# Altium PCB 万能贴片转直插板.PcbDoc
Units mm, origin at the board's own origin, x right, y up, seen from the top; angles counter-clockwise.
Board outline 152.4 x 101.6 mm, 2 copper layers (Top Layer, Bottom Layer); 5 components, 64 nets, 132 pads, 0 vias.
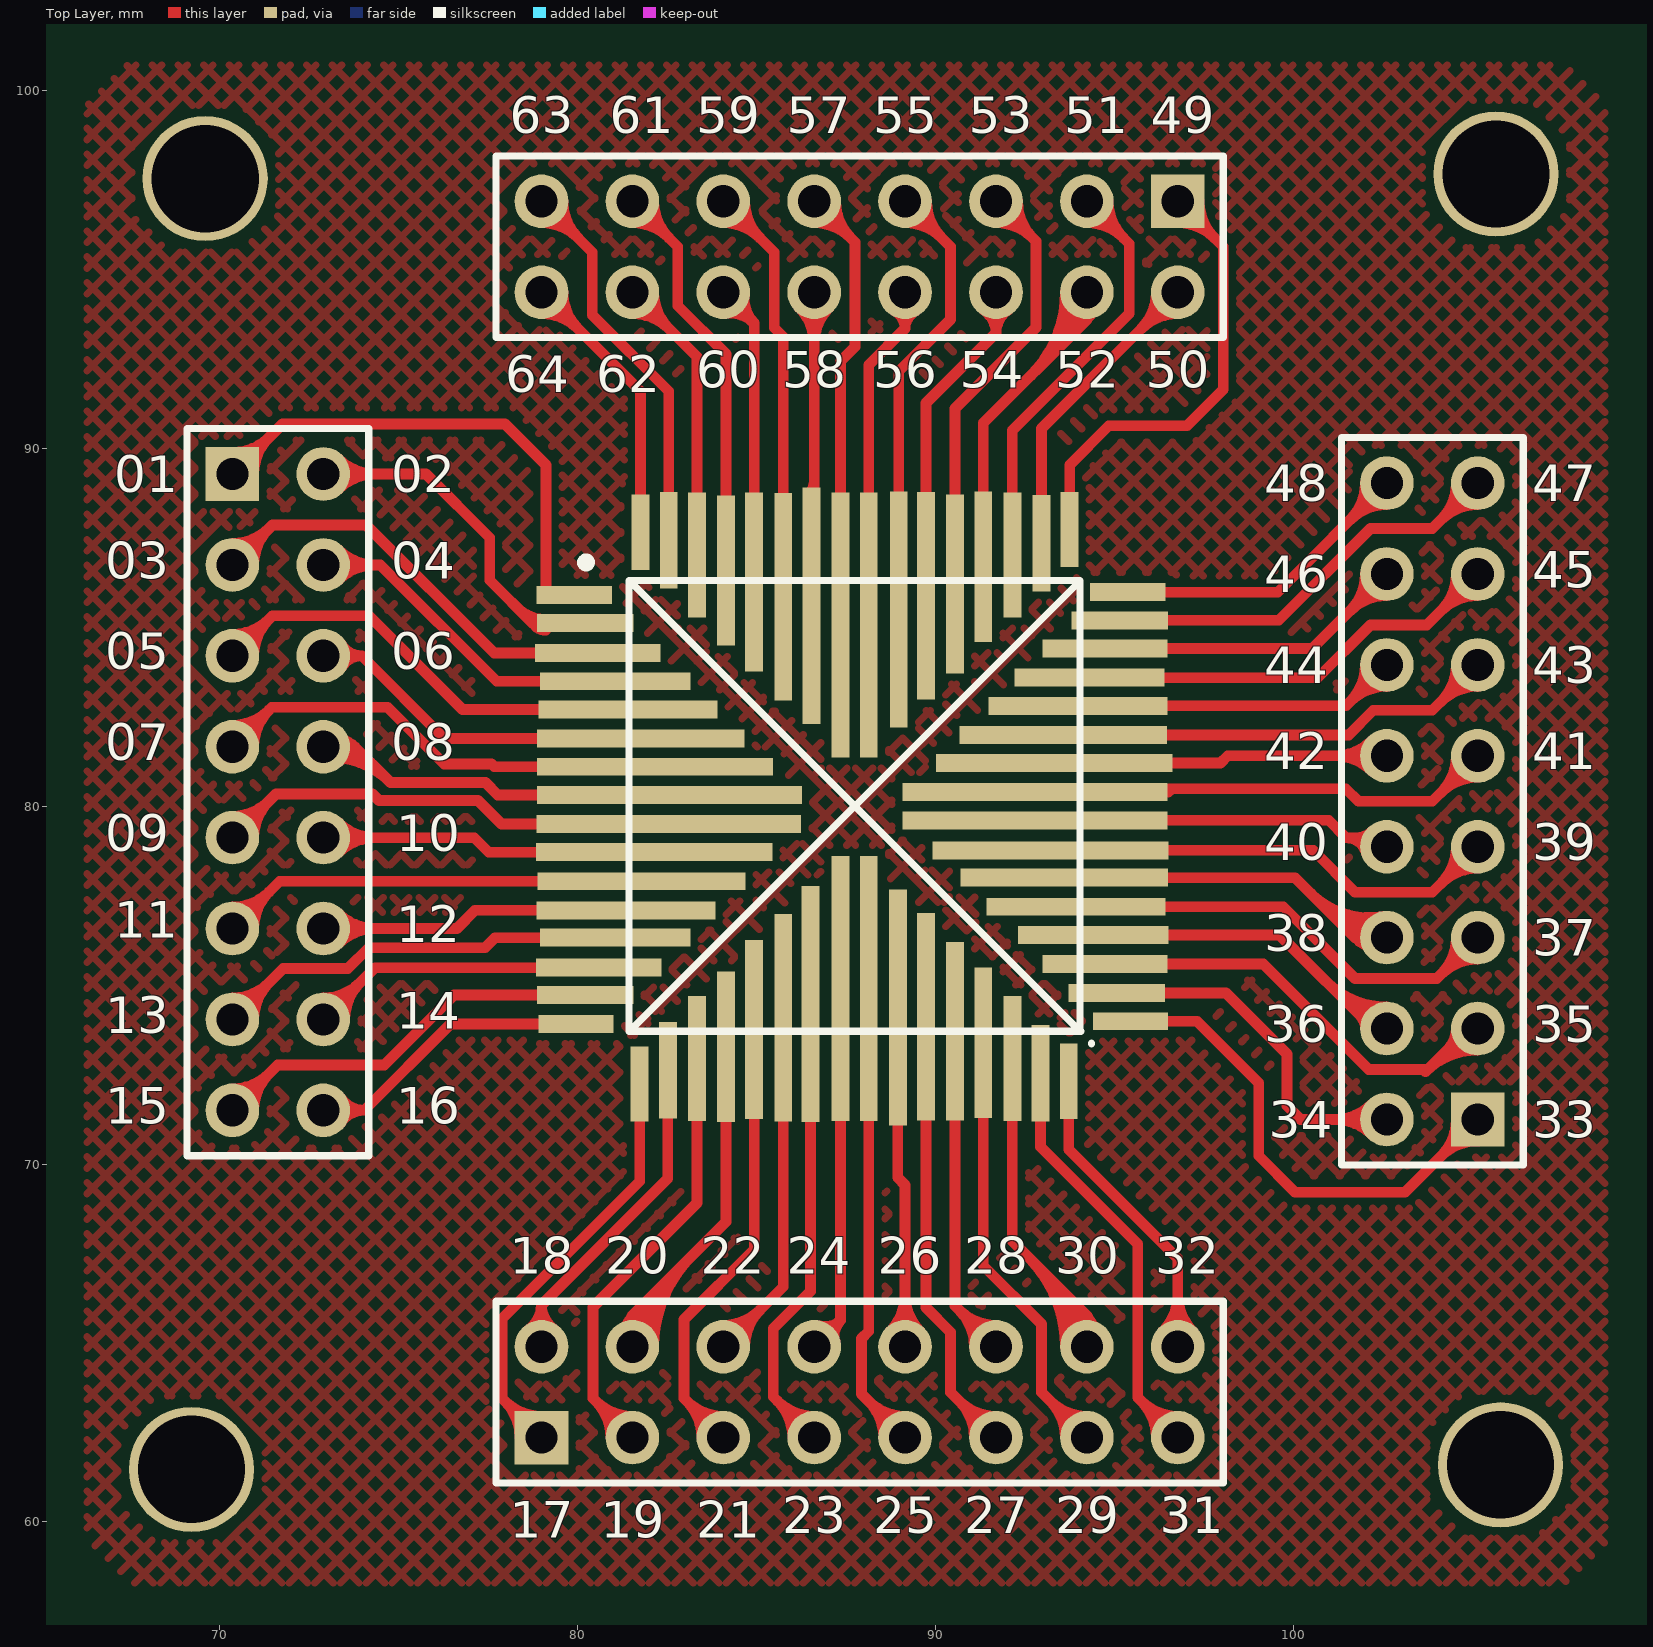
[diagram p0: Top Layer view]
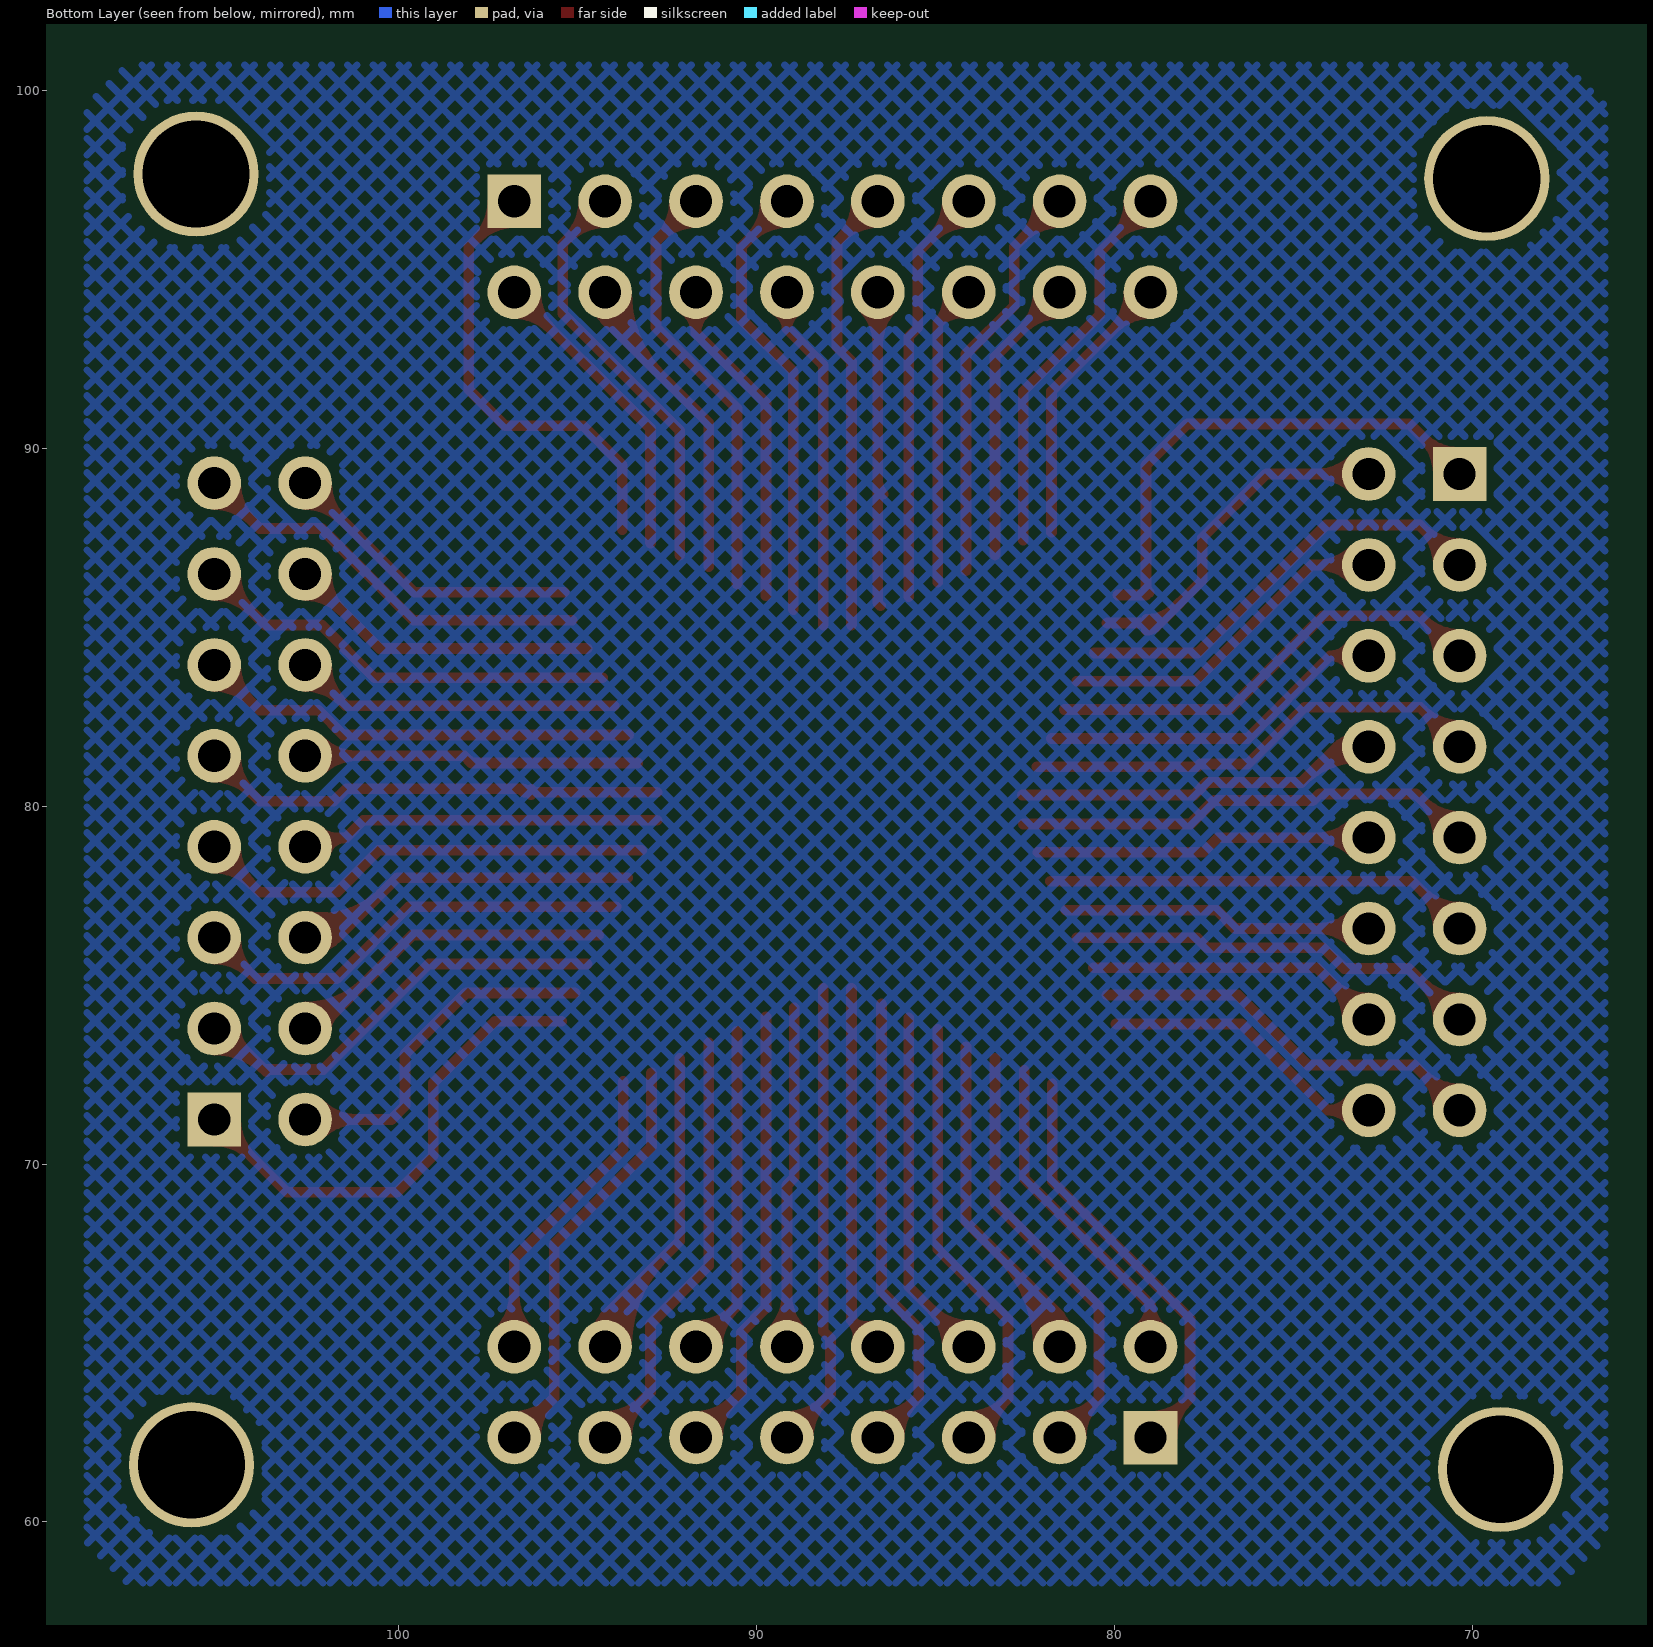
[diagram p1: Bottom Layer view, seen from below]

## Layer stack, top to bottom
Top Layer: signal copper 0.0356
Dielectric: dielectric 0.32, FR-4, Dk 4.8
Bottom Layer: signal copper 0.0356

## Board outline
25.4,25.4 177.8,25.4 177.8,127 25.4,127

## Design rules (kind name [scope] priority, off if disabled: settings)
Clearance [All] p1: gap=0.2
ComponentClearance [All] p1: gap=0.254 collisioncheckmode=3 verticalgap=0.254
PolygonConnect [All] p1: connectstyle=Relief reliefconductorwidth=0.254 reliefentries=4 polygonreliefangle="90 Angle"
RoutingVias [All] p1: holewidth=0.711 width=1.27 viastyle="Through Hole" minholewidth=0.711 minwidth=1.27 maxholewidth=0.711 maxwidth=1.27
SolderMaskExpansion [All] p1: expansion=0.102
TestPointUsage [All] p1: valid=0 allowmultiple=FALSE
Testpoint [All] p1: side=7 testpointundercomponent=TRUE minsize=1.016 maxsize=2.54 preferedsize=1.524 minholesize=0 maxholesize=1.016 preferedholesize=0.813 testpointgrid=0.025 style=1021 order=0123456789
Width [All] p1: maxlimit=0.3 minlimit=0.3 preferedwidth=0.3
17 further rules are at their usual default settings.

## Components (designator, comment, footprint, x,y, rotation, side; value= is the part's Value field where it differs from the comment)
P1 "Header 8X2" HDR2X8 70.358,89.281 r270 top
P2 "Header 8X2" HDR2X8 78.994,62.357 r0 top
P3 "Header 8X2" HDR2X8 105.156,71.247 r90 top
P4 "Header 8X2" HDR2X8 96.774,96.901 r180 top
U1 "ATmega128-16AI" wanneng_2 79.248,85.979 r0 top

## Footprints (in the part's own frame and the unit in brackets; to place one, negate y for a bottom-side part, rotate by r counter-clockwise, add the part's x,y. Pads: shape width x height; smd on the part's side, far side on the other; paste and mask are expansions set on the pad)
HDR2X8 [mm] "Connector; Header; 8x2 Position"
  rect 1.5x1.5 hole 0.9: 1(0,0)
  round 1.5 hole 0.9: 2(0,2.54) 3(2.54,0) 4(2.54,2.54) 5(5.08,0) 6(5.08,2.54) 7(7.62,0) 8(7.62,2.54) 9(10.16,0) 10(10.16,2.54) 11(12.7,0) 12(12.7,2.54) 13(15.24,0) 14(15.24,2.54) 15(17.78,0) 16(17.78,2.54)
  silkscreen extent -1.27,-1.27 19.05,3.81
wanneng_2 [mm]
  rect 2.1x0.5 smd paste+0: 1(0.66,-0.076) 33(16.205,-11.989)
  rect 2.7x0.5 smd: 2(0.965,-0.864) 15(0.965,-11.252) 34(15.824,-11.201) 47(15.9,-0.787)
  rect 3.5x0.5 smd: 3(1.321,-1.702) 14(1.346,-10.49) 35(15.494,-10.389) 46(15.494,-1.575)
  rect 4.2x0.5 smd: 4(1.809,-2.489) 13(1.809,-9.652) 36(15.165,-9.576) 45(15.057,-2.388)
  rect 5x0.5 smd: 5(2.159,-3.277) 12(2.108,-8.89) 37(14.681,-8.788) 44(14.732,-3.175)
  rect 5.8x0.5 smd: 6(2.515,-4.089) 11(2.54,-8.077) 38(14.351,-7.976) 43(14.326,-3.988)
  rect 6.6x0.5 smd: 7(2.921,-4.877) 10(2.896,-7.264) 39(13.97,-7.214) 42(14.072,-4.775)
  rect 7.4x0.5 smd: 8(3.327,-5.664) 9(3.302,-6.477) 40(13.538,-6.375) 41(13.538,-5.588)
  rect 2.1x0.5 smd: 16(0.711,-12.065) 48(16.129,0)
  rect 0.5x2.1 smd paste+0: 17(2.489,-13.741) 49(14.503,1.753)
  rect 0.5x2.7 smd: 18(3.277,-13.36) 31(13.691,-13.437) 50(13.716,1.372) 63(3.302,1.448)
  rect 0.5x3.5 smd: 19(4.089,-13.03) 30(12.903,-13.03) 51(12.903,1.041) 62(4.089,1.041)
  rect 0.5x4.2 smd: 20(4.902,-12.701) 29(12.09,-12.593) 52(12.09,0.712) 61(4.902,0.604)
  rect 0.5x5 smd: 21(5.69,-12.217) 28(11.303,-12.268) 53(11.303,0.229) 60(5.69,0.279)
  rect 0.5x5.8 smd: 22(6.502,-11.887) 27(10.49,-11.862) 54(10.49,-0.102) 59(6.502,-0.127)
  rect 0.5x6.6 smd: 23(7.264,-11.506) 26(9.703,-11.608) 55(9.728,-0.483) 58(7.29,-0.381)
  rect 0.5x7.4 smd: 24(8.103,-11.074) 25(8.89,-11.074) 56(8.89,-0.914) 57(8.103,-0.914)
  rect 0.5x2.1 smd: 32(14.478,-13.665) 64(2.515,1.676)
  silkscreen extent 0.87,-12.62 15.11,0.96

## Part data
P1 P2 P3 P4: "Header, 8-Pin, Dual row"
U1: "8-Bit AVR Microcontroller with 128K Bytes of In-System Programmable Flash Memory"

## Free pads (board coordinates)
  round 3.5 hole 3: 0(69.596,97.536) 1(105.664,97.663) 2(105.791,61.595) 3(69.215,61.468)

## Nets (pads, with @x,y where several pads share a name; then routed paths per layer and width w, separated by ;. In a path a pad name is that pad's centre, name@x,y a point inside that pad or via, vN(x,y) a via of type N, cw(c..) or ccw(c..) an arc to the next point about the centre after c; other vN are vias at no path point)
01: P1.1 U1.1 | length 16.7
  Top Layer w0.3: P1.1 71.755,90.678 77.978,90.678 79.121,89.535 79.121,85.903 U1.1 ; P1.1@70.358,89.881 ccw(c70.358,91.33) 71.382,90.305 ccw(c72.407,89.281) P1.1@70.958,89.281 ; U1.1@79.038,85.974 ccw(c78.837,86.175) 79.121,86.175
02: P1.2 U1.2 | length 13.2
  Top Layer w0.3: P1.2 75.768,89.281 77.546,87.503 77.546,86.309 78.74,85.115 U1.2 ; P1.2@73.322,88.857 cw(c74.347,87.832) 74.347,89.281 cw(c74.347,90.73) P1.2@73.322,89.705 ; 78.305,85.55 ccw(c79.113,86.358) U1.2@79.113,85.215 ; 78.818,85.038 ccw(c79.113,85.334) U1.2@79.113,84.915
03: P1.3 U1.3 | length 14.4
  Top Layer w0.3: P1.3 71.476,87.859 74.092,87.859 77.673,84.277 U1.3 ; P1.3@70.358,87.341 ccw(c70.358,88.79) 71.382,87.765 ccw(c72.407,86.741) P1.3@70.958,86.741
04: P1.4 U1.4 | length 11.8
  Top Layer w0.3: P1.4 74.49,86.741 77.742,83.49 U1.4 ; P1.4@73.322,86.317 cw(c74.347,85.292) 74.347,86.741 cw(c74.347,88.19) P1.4@73.322,87.165
05: P1.5 U1.5 | length 14.9
  Top Layer w0.3: P1.5 71.476,85.319 74.172,85.319 76.788,82.702 U1.5 ; P1.5@70.358,84.801 ccw(c70.358,86.25) 71.382,85.225 ccw(c72.407,84.201) P1.5@70.958,84.201
06: P1.6 U1.6 | length 11.2
  Top Layer w0.3: P1.6 73.97,84.201 ; P1.6@73.41,83.887 cw(c73.97,83.544) 73.97,84.201 ; P1.6@73.41,84.515 ccw(c73.97,84.858) 73.97,84.201 ; U1.6 76.281,81.89 73.97,84.201
07: P1.7 U1.7 | length 15.2
  Top Layer w0.3: P1.7 71.458,82.761 74.694,82.761 76.276,81.178 77.597,81.178 77.673,81.102 U1.7 ; P1.7@70.358,82.261 ccw(c70.358,83.71) 71.382,82.685 ccw(c72.407,81.661) P1.7@70.958,81.661
08: P1.8 U1.8 | length 18.6
  Top Layer w0.3: P1.8@72.875,81.96 cw(c72.968,80.745) 73.83,81.607 ; P1.8@72.921,81.362 cw(c73.099,79.03) 74.753,80.684 ; P1.8@73.107,81.445 cw(c73.549,80.988) 73.998,81.438 ; P1.8@73.315,81.23 cw(c73.761,80.769) 74.214,81.222 ; P1.8@73.457,81.443 cw(c73.775,81.319) 73.775,81.661 ; P1.8@73.457,81.879 ccw(c73.775,82.003) 73.775,81.661 ; 73.783,81.654 ccw(c73.337,81.208) P1.8 ; 74.291,81.145 ccw(c73.034,79.888) P1.8 ; U1.8 77.775,80.315 77.429,80.661 74.775,80.661 73.775,81.661 ; P1.8 73.775,81.661
09: P1.9 U1.9 | length 15.3
  Top Layer w0.3: P1.9 71.577,80.34 74.275,80.34 74.455,80.161 77.217,80.161 77.876,79.502 U1.9 ; P1.9@70.358,79.721 ccw(c70.358,81.17) 71.382,80.145 ccw(c72.407,79.121) P1.9@70.958,79.121
10: P1.10 U1.10 | length 11.7
  Top Layer w0.3: P1.10 77.114,79.121 77.521,78.715 U1.10 ; P1.10@73.322,78.697 cw(c74.347,77.672) 74.347,79.121 cw(c74.347,80.57) P1.10@73.322,79.545
11: P1.11 U1.11 | length 14.3
  Top Layer w0.3: P1.11 71.679,77.902 U1.11 ; P1.11@70.358,77.181 ccw(c70.358,78.63) 71.382,77.605 ccw(c72.407,76.581) P1.11@70.958,76.581
12: P1.12 U1.12 | length 10.9
  Top Layer w0.3: P1.12 76.632,76.581 77.14,77.089 U1.12 ; P1.12@73.322,76.157 cw(c74.347,75.132) 74.347,76.581 cw(c74.347,78.03) P1.12@73.322,77.005
13: P1.13 U1.13 | length 13.9
  Top Layer w0.3: P1.13 71.78,75.463 73.584,75.463 74.168,76.048 77.419,76.048 77.699,76.327 U1.13 ; P1.13@70.358,74.641 ccw(c70.358,76.09) 71.382,75.065 ccw(c72.407,74.041) P1.13@70.958,74.041
14: P1.14 U1.14 | length 10.6
  Top Layer w0.3: P1.14 74.346,75.489 U1.14 ; P1.14@72.898,74.641 ccw(c72.898,76.09) 73.922,75.065 ccw(c74.947,74.041) P1.14@73.498,74.041
15: P1.15 U1.15 | length 13.5
  Top Layer w0.3: P1.15 71.628,72.771 74.6,72.771 76.556,74.727 U1.15 ; P1.15@70.358,72.101 ccw(c70.358,73.55) 71.382,72.525 ccw(c72.407,71.501) P1.15@70.958,71.501
16: P1.16 U1.16 | length 9.6
  Top Layer w0.3: P1.16 74.041,71.501 ; P1.16@73.392,71.16 cw(c74.041,70.712) 74.041,71.501 ; P1.16@73.392,71.842 ccw(c74.041,72.29) 74.041,71.501 ; U1.16 76.454,73.914 74.041,71.501
17: P2.1 U1.17 | length 14.2
  Top Layer w0.3: P2.1@78.394,62.357 ccw(c76.945,62.357) 77.97,63.381 ccw(c78.994,64.406) P2.1@78.994,62.957 ; P2.1 77.894,63.457 77.894,65.677 81.737,69.52 U1.17
18: P2.2 U1.18 | length 10.8
  Top Layer w0.3: P2.2@78.644,65.385 ccw(c78.156,66.065) 78.994,66.065 ; P2.2 78.994,66.065 ; P2.2@79.344,65.385 cw(c79.832,66.065) 78.994,66.065 ; U1.18 82.525,69.596 78.994,66.065
19: P2.3 U1.19 | length 14.5
  Top Layer w0.3: P2.3@80.934,62.357 ccw(c79.485,62.357) 80.51,63.381 ccw(c81.534,64.406) P2.3@81.534,62.957 ; P2.3 80.434,63.457 80.434,66.007 83.337,68.91 U1.19
20: P2.4 U1.20 | length 18.1
  Top Layer w0.3: P2.4@81.234,64.897 cw(c82.627,64.897) 81.642,65.882 ; P2.4@81.317,65.456 ccw(c81.193,65.774) 81.534,65.774 ; P2.4@81.751,65.456 cw(c81.875,65.774) 81.534,65.774 ; P2.4@81.834,64.897 cw(c84.675,64.897) 82.666,66.906 ; P2.4@82.134,64.897 cw(c85.7,64.897) 83.178,67.418 ; 82.154,66.394 ccw(c83.651,64.897) P2.4 81.534,65.774 ; U1.20 84.15,68.39 81.534,65.774
21: P2.5 U1.21 | length 14.9
  Top Layer w0.3: P2.5@83.474,62.357 ccw(c82.025,62.357) 83.05,63.381 ccw(c84.074,64.406) P2.5@84.074,62.957 ; P2.5 82.974,63.457 82.974,65.659 84.938,67.623 U1.21
22: P2.6 U1.22 | length 12.2
  Top Layer w0.3: P2.6 85.75,66.573 U1.22 ; P2.6@84.074,65.497 ccw(c84.074,66.946) 85.098,65.921 ccw(c86.123,64.897) P2.6@84.674,64.897
23: P2.7 U1.23 | length 15.3
  Top Layer w0.3: P2.7@86.014,62.357 ccw(c84.565,62.357) 85.59,63.381 ccw(c86.614,64.406) P2.7@86.614,62.957 ; U1.23 86.512,66.446 85.471,65.405 85.471,63.5 P2.7
24: P2.8 U1.24 | length 11.6
  Top Layer w0.3: P2.8 87.351,65.634 ; P2.8@86.768,65.477 ccw(c86.923,66.061) 87.351,65.634 ; P2.8@87.194,65.051 cw(c87.778,65.206) 87.351,65.634 ; U1.24 87.351,65.634
25: P2.9 U1.25 | length 15.4
  Top Layer w0.3: U1.25 88.138,65.329 87.935,65.126 87.935,63.576 P2.9 ; P2.9@88.554,62.357 ccw(c87.105,62.357) 88.13,63.381 ccw(c89.154,64.406) P2.9@89.154,62.957
26: P2.10 U1.26 | length 11.8
  Top Layer w0.3: P2.10@88.73,65.321 ccw(c87.705,66.346) 89.154,66.346 ccw(c90.603,66.346) P2.10@89.578,65.321 ; U1.26 88.951,69.621 89.154,69.418 P2.10
27: P2.11 U1.27 | length 14.8
  Top Layer w0.3: U1.27 89.738,65.989 90.424,65.303 90.424,63.627 P2.11 ; P2.11@91.094,62.357 ccw(c89.645,62.357) 90.67,63.381 ccw(c91.694,64.406) P2.11@91.694,62.957
28: P2.12 U1.28 | length 11.6
  Top Layer w0.3: U1.28 90.551,66.04 P2.12 ; P2.12@91.094,64.897 ccw(c89.645,64.897) 90.67,65.921 ccw(c91.694,66.946) P2.12@91.694,65.497
29: P2.13 U1.29 | length 14.5
  Top Layer w0.3: U1.29 91.338,67.158 92.964,65.532 92.964,63.627 P2.13 ; P2.13@93.634,62.357 ccw(c92.185,62.357) 93.21,63.381 ccw(c94.234,64.406) P2.13@94.234,62.957
30: P2.14 U1.30 | length 17.4
  Top Layer w0.3: U1.30 92.151,67.847 94.234,65.765 ; 92.596,67.402 cw(c90.091,64.897) P2.14@93.634,64.897 ; 93.108,66.89 cw(c91.115,64.897) P2.14@93.934,64.897 ; 93.621,66.378 cw(c92.14,64.897) P2.14 94.234,65.765 ; P2.14@94.022,65.458 ccw(c93.907,65.764) 94.234,65.764 ; 94.133,65.866 cw(c93.164,64.897) P2.14@94.534,64.897 ; P2.14@94.446,65.458 cw(c94.561,65.764) 94.234,65.764
31: P2.15 U1.31 | length 14
  Top Layer w0.3: U1.31 92.939,70.485 95.656,67.767 95.656,63.475 P2.15 ; P2.15@96.174,62.357 ccw(c94.725,62.357) 95.75,63.381 ccw(c96.774,64.406) P2.15@96.774,62.957
32: P2.16 U1.32 | length 11
  Top Layer w0.3: U1.32 93.726,70.409 96.774,67.361 P2.16 ; P2.16@96.35,65.321 ccw(c95.325,66.346) 96.774,66.346 ccw(c98.223,66.346) P2.16@97.198,65.321
33: P3.1 U1.33 | length 16
  Top Layer w0.3: U1.33 97.307,73.99 99.035,72.263 99.035,70.231 100.051,69.215 103.124,69.215 P3.1 ; P3.1@104.556,71.247 cw(c103.107,71.247) 104.132,70.223 cw(c105.156,69.198) P3.1@105.156,70.647
34: P3.2 U1.34 | length 12.1
  Top Layer w0.3: U1.34 98.12,74.778 99.822,73.076 99.822,71.628 100.203,71.247 P3.2 ; P3.2@102.192,70.823 ccw(c101.167,69.798) 101.167,71.247 ccw(c101.167,72.696) P3.2@102.192,71.671
35: P3.3 U1.35 | length 15.4
  Top Layer w0.3: U1.35 99.162,75.59 102.108,72.644 103.759,72.644 104.902,73.787 P3.3 ; 103.698,72.583 cw(c105.156,71.125) P3.3@105.156,73.187 ; 104.21,73.095 cw(c105.156,72.15) P3.3@105.156,73.487 ; 104.311,73.196 ccw(c103.721,73.787) P3.3@104.556,73.787
36: P3.4 U1.36 | length 12.9
  Top Layer w0.3: U1.36 99.619,76.403 102.235,73.787 P3.4 ; 100.941,75.081 ccw(c102.616,76.755) P3.4@102.616,74.387 ; 101.453,74.569 ccw(c102.616,75.731) P3.4@102.616,74.087 ; 101.861,74.161 cw(c101.487,73.787) P3.4@102.016,73.787
37: P3.5 U1.37 | length 14.8
  Top Layer w0.3: U1.37 99.72,77.191 101.727,75.184 104.013,75.184 P3.5 ; P3.5@104.556,76.327 cw(c103.107,76.327) 104.132,75.303 cw(c105.156,74.278) P3.5@105.156,75.727
38: P3.6 U1.38 | length 17
  Top Layer w0.3: U1.38 100.051,78.003 101.727,76.327 ; 100.495,77.559 ccw(c102.123,79.186) P3.6@102.514,76.918 ; 100.904,77.15 ccw(c102.243,78.488) P3.6@102.565,76.623 ; 101.314,76.74 ccw(c102.364,77.79) P3.6 101.727,76.327 ; 101.723,76.331 ccw(c102.484,77.092) P3.6@102.667,76.031 ; P3.6@102.06,76.103 ccw(c101.727,75.968) 101.727,76.327 ; P3.6@102.06,76.551 cw(c101.727,76.686) 101.727,76.327
39: P3.7 U1.39 | length 15.2
  Top Layer w0.3: U1.39 100.559,78.765 101.727,77.597 103.886,77.597 P3.7 ; P3.7@104.556,78.867 cw(c103.107,78.867) 104.132,77.843 cw(c105.156,76.818) P3.7@105.156,78.267
40: P3.8 U1.40 | length 12
  Top Layer w0.3: U1.40 100.99,79.604 101.473,79.121 ; 101.781,79.121 ccw(c101.781,79.702) P3.8@102.192,79.291 ; 101.875,79.121 cw(c101.875,78.648) P3.8@102.328,78.782 ; P3.8@102.041,78.697 ccw(c101.473,78.529) 101.473,79.121 ; P3.8 102.362,79.121 101.473,79.121
41: P3.9 U1.41 | length 16.5
  Top Layer w0.3: U1.41 96.499,80.391 96.596,80.488 ; U1.41@96.298,80.47 ccw(c96.436,80.648) 96.596,80.488 ; U1.41@96.307,80.32 cw(c96.713,79.914) 96.713,80.488 ; U1.41@96.321,80.337 cw(c96.596,80.162) 96.596,80.488 ; P3.9@104.556,81.407 cw(c103.107,81.407) 104.132,80.383 cw(c105.156,79.358) P3.9@105.156,80.807 ; P3.9 103.886,80.137 101.82,80.137 101.469,80.488 96.596,80.488
42: P3.10 U1.42 | length 11.7
  Top Layer w0.3: U1.42 97.968,81.204 98.171,81.407 P3.10 ; P3.10@102.192,80.983 ccw(c101.167,79.958) 101.167,81.407 ccw(c101.167,82.856) P3.10@102.192,81.831
43: P3.11 U1.43 | length 14.7
  Top Layer w0.3: U1.43 101.549,81.991 102.235,82.677 103.886,82.677 P3.11 ; P3.11@104.556,83.947 cw(c103.107,83.947) 104.132,82.923 cw(c105.156,81.898) P3.11@105.156,83.347
44: P3.12 U1.44 | length 11.4
  Top Layer w0.3: U1.44 101.473,82.804 P3.12 ; P3.12@102.016,83.947 cw(c100.567,83.947) 101.592,82.923 cw(c102.616,81.898) P3.12@102.616,83.347
45: P3.13 U1.45 | length 14.3
  Top Layer w0.3: U1.45 100.686,83.591 102.159,85.065 103.734,85.065 P3.13 ; P3.13@104.556,86.487 cw(c103.107,86.487) 104.132,85.463 cw(c105.156,84.438) P3.13@105.156,85.887
46: P3.14 U1.46 | length 11
  Top Layer w0.3: U1.46 100.533,84.404 P3.14 ; P3.14@102.016,86.487 cw(c100.567,86.487) 101.592,85.463 cw(c102.616,84.438) P3.14@102.616,85.887
47: P3.15 U1.47 | length 13.9
  Top Layer w0.3: U1.47 99.593,85.192 102.159,87.757 103.886,87.757 P3.15 ; P3.15@104.556,89.027 cw(c103.107,89.027) 104.132,88.003 cw(c105.156,86.978) P3.15@105.156,88.427
48: P3.16 U1.48 | length 10.8
  Top Layer w0.3: U1.48 99.568,85.979 P3.16 ; P3.16@102.016,89.027 cw(c100.567,89.027) 101.592,88.003 cw(c102.616,86.978) P3.16@102.616,88.427
49: P4.1 U1.49 | length 15
  Top Layer w0.3: U1.49 93.751,89.535 94.844,90.627 97.028,90.627 98.044,91.643 98.044,95.631 P4.1 ; P4.1@96.774,96.301 cw(c96.774,94.852) 97.798,95.877 cw(c98.823,96.901) P4.1@97.374,96.901
50: P4.2 U1.50 | length 10.9
  Top Layer w0.3: U1.50 92.964,90.551 P4.2 ; P4.2@96.174,94.361 cw(c94.725,94.361) 95.75,93.337 cw(c96.774,92.312) P4.2@96.774,93.761
51: P4.3 U1.51 | length 14
  Top Layer w0.3: U1.51 92.151,90.5 95.42,93.769 95.42,95.715 P4.3 ; P4.3@94.234,96.301 cw(c94.234,94.852) 95.258,95.877 cw(c96.283,96.901) P4.3@94.834,96.901
52: P4.4 U1.52 | length 16.3
  Top Layer w0.3: U1.52 91.338,90.703 94.234,93.599 ; 92.671,92.036 ccw(c90.346,94.361) P4.4@93.634,94.361 ; 93.183,92.548 ccw(c91.37,94.361) P4.4@93.934,94.361 ; 93.695,93.06 ccw(c92.394,94.361) P4.4 94.234,93.599 ; P4.4@94.093,93.778 cw(c94.05,93.599) 94.234,93.599 ; 94.207,93.572 ccw(c93.419,94.361) P4.4@94.534,94.361 ; P4.4@94.375,93.778 ccw(c94.418,93.599) 94.234,93.599
53: P4.5 U1.53 | length 14.4
  Top Layer w0.3: U1.53 90.551,91.114 92.812,93.374 92.812,95.783 P4.5 ; P4.5@91.694,96.301 cw(c91.694,94.852) 92.718,95.877 cw(c93.743,96.901) P4.5@92.294,96.901
54: P4.6 U1.54 | length 10.8
  Top Layer w0.3: U1.54 89.738,91.262 91.694,93.218 ; P4.6@91.353,93.867 cw(c90.905,93.218) 91.694,93.218 ; P4.6 91.694,93.218 ; P4.6@92.035,93.867 ccw(c92.483,93.218) 91.694,93.218
55: P4.7 U1.55 | length 14.8
  Top Layer w0.3: U1.55 88.976,92.151 90.424,93.599 90.424,95.631 P4.7 ; P4.7@89.154,96.301 cw(c89.154,94.852) 90.178,95.877 cw(c91.203,96.901) P4.7@89.754,96.901
56: P4.8 U1.56 | length 10.9
  Top Layer w0.3: U1.56 88.138,92.329 89.154,93.345 ; P4.8@88.864,93.836 cw(c88.594,93.345) 89.154,93.345 ; P4.8 89.154,93.345 ; P4.8@89.444,93.836 ccw(c89.714,93.345) 89.154,93.345
57: P4.9 U1.57 | length 14.8
  Top Layer w0.3: P4.9@86.614,96.301 cw(c86.614,94.852) 87.638,95.877 cw(c88.663,96.901) P4.9@87.214,96.901 ; P4.9 87.757,95.758 87.757,92.837 87.351,92.431 U1.57
58: P4.10 U1.58 | length 11.5
  Top Layer w0.3: P4.10@86.19,93.937 cw(c85.165,92.912) 86.614,92.912 cw(c88.063,92.912) P4.10@87.038,93.937 ; U1.58@86.467,88.719 ccw(c86.112,89.073) 86.614,89.073 ; U1.58 86.614,85.674 P4.10
59: P4.11 U1.59 | length 14
  Top Layer w0.3: P4.11@84.074,96.301 cw(c84.074,94.852) 85.098,95.877 cw(c86.123,96.901) P4.11@84.674,96.901 ; P4.11 85.496,95.479 85.496,93.37 85.75,93.116 U1.59
60: P4.12 U1.60 | length 10.2
  Top Layer w0.3: P4.12 84.938,93.497 ; P4.12@84.151,93.766 cw(c84.271,92.831) 84.938,93.497 ; P4.12@84.669,94.284 ccw(c85.604,94.164) 84.938,93.497 ; U1.60 84.938,93.497
61: P4.13 U1.61 | length 13.7
  Top Layer w0.3: P4.13@81.534,96.301 cw(c81.534,94.852) 82.558,95.877 cw(c83.583,96.901) P4.13@82.134,96.901 ; P4.13 82.804,95.631 82.804,93.98 84.15,92.634 U1.61
62: P4.14 U1.62 | length 10.4
  Top Layer w0.3: P4.14@81.534,93.761 cw(c81.534,92.312) 82.558,93.337 cw(c83.583,94.361) P4.14@82.134,94.361 ; P4.14 83.337,92.558 U1.62
63: P4.15 U1.63 | length 13.2
  Top Layer w0.3: P4.15@78.994,96.301 cw(c78.994,94.852) 80.018,95.877 cw(c81.043,96.901) P4.15@79.594,96.901 ; P4.15 80.416,95.479 80.416,93.726 82.55,91.592 U1.63
64: P4.16 U1.64 | length 10.1
  Top Layer w0.3: P4.16@78.994,93.761 cw(c78.994,92.312) 80.018,93.337 cw(c81.043,94.361) P4.16@79.594,94.361 ; P4.16 81.763,91.592 U1.64

## Polygon pours and split planes (outlines as drawn)
no net on Top Layer (hatched 45Degree grid 0.508 track 0.203): 67.564,58.293 66.294,59.563 66.294,99.568 67.437,100.711 107.569,100.711 108.712,99.568 108.712,59.436 107.696,58.42 107.569,58.293
no net on Bottom Layer (hatched 45Degree grid 0.508 track 0.203): 68.58,58.293 67.564,58.293 66.294,59.563 66.294,99.568 67.437,100.711 107.569,100.711 108.712,99.568 108.712,59.436 107.569,58.293

## Silkscreen, mask and mechanical layers (free items; w line width, h text height)
Top Overlay:
  text "63" at 78.105,98.806 h1.02
  text "61" at 80.899,98.806 h1.02
  text "59" at 83.312,98.806 h1.02
  text "57" at 85.852,98.806 h1.02
  text "55" at 88.265,98.806 h1.02
  text "53" at 90.932,98.806 h1.02
  text "51" at 93.599,98.806 h1.02
  text "49" at 96.012,98.806 h1.02
  text "60" at 83.312,91.694 h1.02
  text "58" at 85.725,91.694 h1.02
  text "56" at 88.265,91.694 h1.02
  text "54" at 90.678,91.694 h1.02
  text "52" at 93.345,91.694 h1.02
  text "50" at 95.885,91.694 h1.02
  text "64" at 77.978,91.567 h1.02
  text "62" at 80.518,91.567 h1.02
  text "01" at 67.056,88.773 h1.02
  text "02" at 74.803,88.773 h1.02
  text "48" at 99.187,88.519 h1.02
  text "47" at 106.68,88.519 h1.02
  text "03" at 66.802,86.36 h1.02
  text "04" at 74.803,86.36 h1.02
  text "45" at 106.68,86.106 h1.02
  text "46" at 99.187,85.979 h1.02
  text "05" at 66.802,83.82 h1.02
  text "06" at 74.803,83.82 h1.02
  text "44" at 99.187,83.439 h1.02
  text "43" at 106.68,83.439 h1.02
  text "07" at 66.802,81.28 h1.02
  text "08" at 74.803,81.28 h1.02
  text "42" at 99.187,81.026 h1.02
  text "41" at 106.68,81.026 h1.02
  text "09" at 66.802,78.74 h1.02
  text "10" at 74.93,78.74 h1.02
  text "40" at 99.187,78.486 h1.02
  text "39" at 106.68,78.486 h1.02
  text "11" at 67.056,76.327 h1.02
  text "12" at 74.93,76.2 h1.02
  text "38" at 99.187,75.946 h1.02
  text "37" at 106.68,75.819 h1.02
  text "14" at 74.93,73.787 h1.02
  text "13" at 66.802,73.66 h1.02
  text "36" at 99.187,73.406 h1.02
  text "35" at 106.68,73.406 h1.02
  text "15" at 66.802,71.12 h1.02
  text "16" at 74.93,71.12 h1.02
  text "34" at 99.314,70.739 h1.02
  text "33" at 106.68,70.739 h1.02
  text "18" at 78.105,66.929 h1.02
  text "20" at 80.772,66.929 h1.02
  text "22" at 83.439,66.929 h1.02
  text "24" at 85.852,66.929 h1.02
  text "26" at 88.392,66.929 h1.02
  text "28" at 90.805,66.929 h1.02
  text "30" at 93.345,66.929 h1.02
  text "32" at 96.139,66.929 h1.02
  text "23" at 85.725,59.69 h1.02
  text "25" at 88.265,59.69 h1.02
  text "27" at 90.805,59.69 h1.02
  text "29" at 93.345,59.69 h1.02
  text "31" at 96.266,59.69 h1.02
  text "17" at 78.105,59.563 h1.02
  text "19" at 80.645,59.563 h1.02
  text "21" at 83.312,59.563 h1.02
Mechanical 1:
  lines w0.254: 65.913,59.309 67.31,57.912 107.823,57.912 109.093,59.182 109.093,99.822 107.823,101.092 67.183,101.092 65.913,99.822 65.913,59.309